# EAGLE board fabduino (EAGLE 6.4)
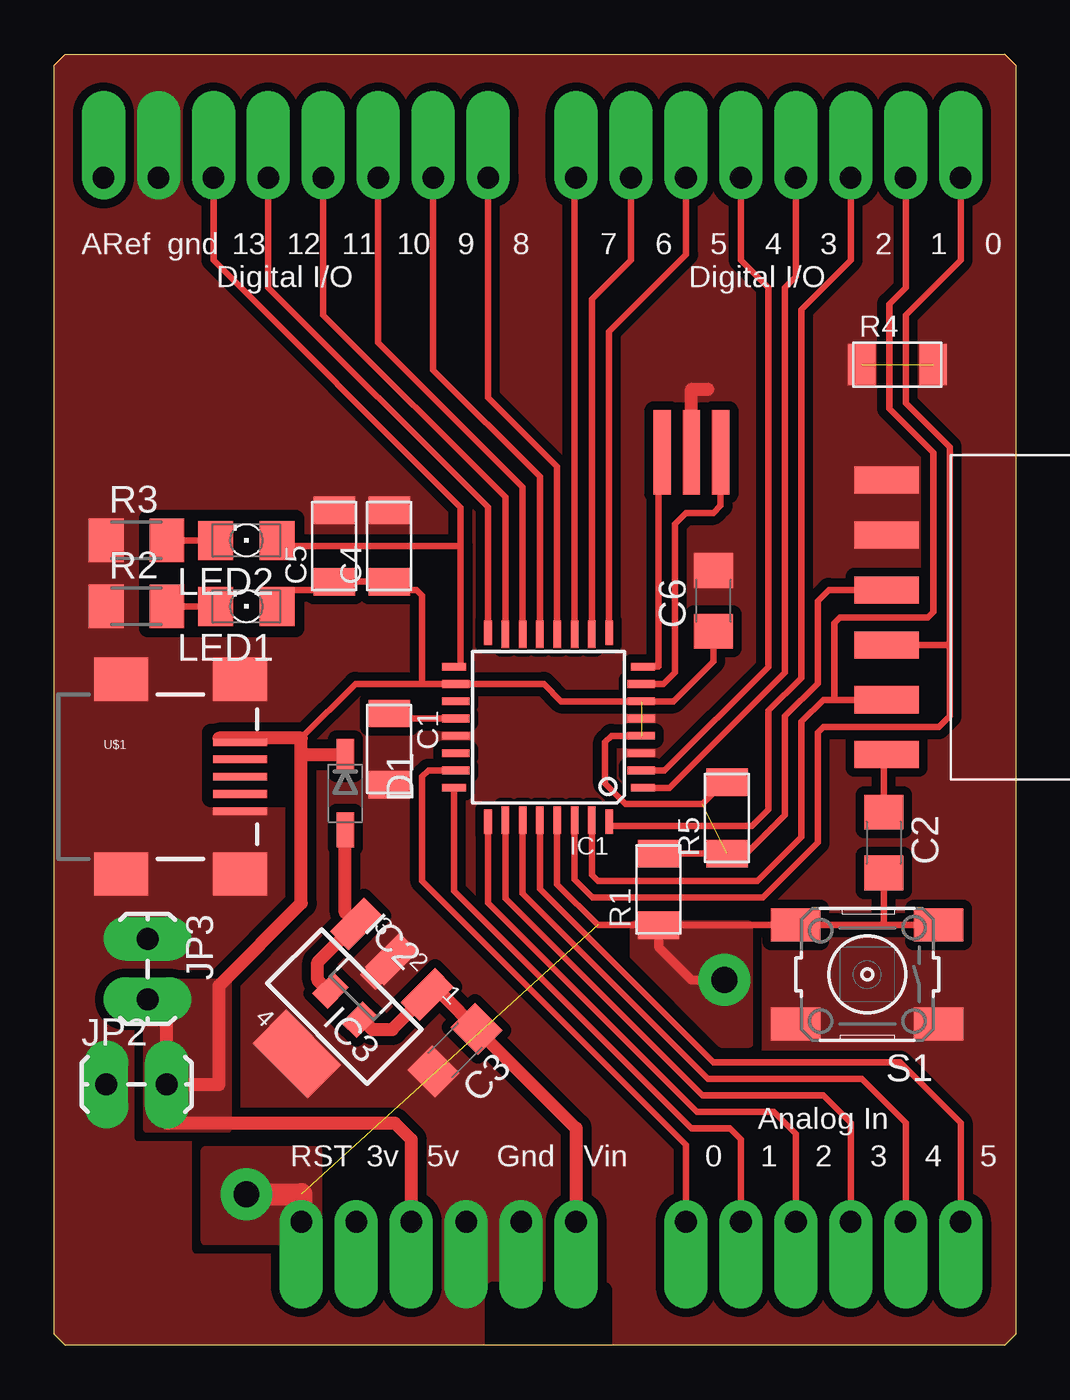
[diagram p0: board, top side]
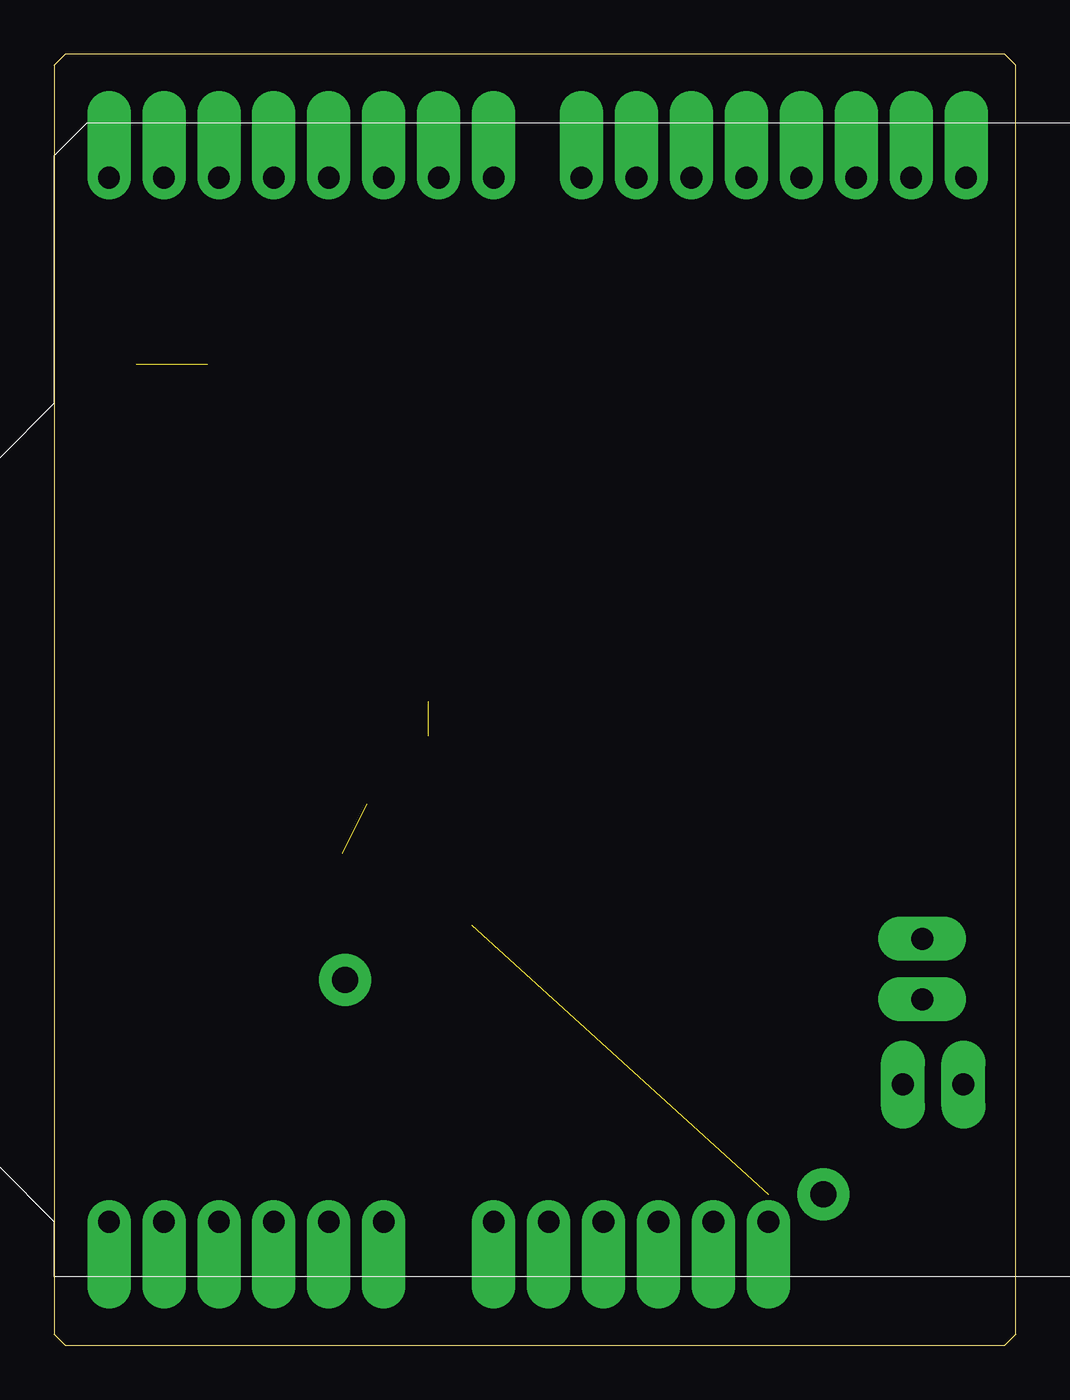
[diagram p1: board, bottom side, seen from below]

Size 44.45 x 59.69 mm. Coordinates in mm from the lower left corner, seen from the top.
Outline: 0,59.18 0.51,59.69 43.94,59.69 44.45,59.18 44.45,0.51 43.94,0 0.51,0 0,0.51 0,59.18
Copper layers (1*16): Top 0.035mm / dielectric 1.5mm / Bottom 0.035mm
Design rules "fab *": minimum track width 12mil, minimum drill 0.8mm, track to track 15.5mil, track to pad 15.5mil, pad to pad 15mil, via to via 15mil, smd to smd 10mil, copper to edge 0mil, drill to drill 1mm, minimum pad ring 0.2mm, minimum via ring 0.2mm, stop-mask expansion 4mil, vias tented up to drill 0mil, thermal gap 1mm
tRestrict: area 20.3,0 to 25.4,2.5; area 4.3,33.1 to 11.2,38.2; area 27.7,39.4 to 31.2,43.2; area 7.2,25.3 to 10.8,28.3; area 12.6,14.9 to 14.3,16.6

## Footprints (pad centres in the part's own frame; a part is rotated, then mirrored left to right if it is on the bottom)
C1206FAB = smd 1.27 x 1.905: 1 -1.651,0; 2 1.651,0
C1206 = smd 1.6 x 1.8: 1 -1.4,0; 2 1.4,0
SOD123 = smd 1.6 x 0.8: ANODE 1.7,0; CATHODE -1.7,0
TQFP32-08THIN = smd 1.118 x 0.356: 1 -4.369,2.8; 8 -4.369,-2.8; 17 4.369,-2.8; 24 4.369,2.8 | smd 1.27 x 0.356: 2 -4.293,2; 3 -4.293,1.2; 4 -4.293,0.4; 5 -4.293,-0.4; 6 -4.293,-1.2; 7 -4.293,-2; 18 4.293,-2; 19 4.293,-1.2; 20 4.293,-0.4; 21 4.293,0.4; 22 4.293,1.2; 23 4.293,2 | smd 0.356 x 1.118: 9 -2.8,-4.369; 16 2.8,-4.369; 25 2.8,4.369; 32 -2.8,4.369 | smd 0.356 x 1.27: 10 -2,-4.293; 14 1.2,-4.293; 15 2,-4.293; 26 2,4.293; 27 1.2,4.293; 31 -2,4.293 | smd 0.35 x 1.27: 11 -1.2,-4.293; 12 -0.4,-4.293; 13 0.4,-4.293; 28 0.4,4.293; 29 -0.4,4.293; 30 -1.2,4.293
SOT23 = smd 1 x 1.4: 1 -0.95,-1.1; 2 0.95,-1.1; 3 0,1.1
SOT223 = smd 1.219 x 2.235: 1 -2.311,-3.099; 2 0,-3.099; 3 2.311,-3.099 | smd 3.6 x 2.2: 4 0,3.099
ARDUINO-NOHOLE-OBLONG = drill 1 pad 1.676 offset: 3V 35.56,2.54; 5V 38.1,2.54; A0 50.8,2.54; A1 53.34,2.54; A2 55.88,2.54; A3 58.42,2.54; A4 60.96,2.54; A5 63.5,2.54; AREF 23.876,50.8; D0 63.5,50.8; D1 60.96,50.8; D2 58.42,50.8; D3 55.88,50.8; D4 53.34,50.8; D5 50.8,50.8; D6 48.26,50.8; D7 45.72,50.8; D8 41.656,50.8; D9 39.116,50.8; D10 36.576,50.8; D11 34.036,50.8; D12 31.496,50.8; D13 28.956,50.8; GND 26.416,50.8; GND1 43.18,2.54; GND2 40.64,2.54; RESET 33.02,2.54; VIN 45.72,2.54
1X06-SMD-FEMALE-V2 = smd 1.25 x 3: 1 6.35,3.425; 2 3.81,3.425; 3 1.27,3.425; 4 -1.27,3.425; 5 -3.81,3.425; 6 -6.35,3.425
1X02_LOCK_LONGPADS = drill 1.016 long: 1 -0.127,0; 2 2.667,0
1206 = smd 1.6 x 1.803: A -1.422,0; C 1.422,0
R1206FAB = smd 1.27 x 1.905: 1 -1.651,0; 2 1.651,0
M1206 = smd 1.6 x 2: 1 -1.4,0; 2 1.4,0
6MM_SWITCH = smd 2.286 x 1.524: 1 -3.302,2.286; 2 3.302,2.286; 3 -3.302,-2.286; 4 3.302,-2.286
USB_MINIB = smd 2.5 x 0.35: D+ 3.77,0; D- 3.77,0.8; GND 3.77,-1.6; ID 3.77,-0.8; VBUS 3.77,1.6 | smd 2.5 x 2: SHIELD@1 -1.73,-4.5; SHIELD@2 -1.73,4.5; SHIELD@3 3.77,4.5; SHIELD@4 3.77,-4.5
EFOBM = smd 0.8 x 3.9: 1 -1.35,0; 2 0,0; 3 1.35,0

## Placement (x,y rotation side)
C1  0.1u  [C1206FAB]  15.49,27.56 270 top
C2  0.1u  [C1206]  38.35,23.24 270 top
C3  10u  [C1206]  18.54,13.65 225 top
C4  0.1u  [C1206FAB]  15.49,36.96 90 top
C5  10u  [C1206FAB]  12.95,36.96 90 top
C6  0.1u  [C1206]  30.48,34.42 90 top
D1  [SOD123]  13.46,25.53 270 top
IC1  ATMEGA168  [TQFP32-08THIN]  22.86,28.57 180 top
IC2  [SOT23]  14.22,16.51 315 top
IC3  LM340S  [SOT223]  13.42,15.66 135 top
J4  ARDUINOOBLONG  [ARDUINO-NOHOLE-OBLONG]  -21.59,3.17 0 top
JP1  [1X06-SMD-FEMALE-V2]  41.91,33.66 90 top
JP2  [1X02_LOCK_LONGPADS]  2.54,12.07 0 top
JP3  [1X02_LOCK_LONGPADS]  4.32,18.67 270 top
LED1  GRN  [1206]  8.89,34.16 180 top
LED2  RED  [1206]  8.89,37.21 180 top
R1  10K  [R1206FAB]  27.94,21.08 90 top
R2  499  [M1206]  3.81,34.16 0 top
R3  499  [M1206]  3.81,37.21 0 top
R4  0  [R1206FAB]  38.99,45.34 0 top
R5  0  [R1206FAB]  31.11,24.38 90 top
S1  [6MM_SWITCH]  37.59,17.14 180 top
U$1  USB_MINIB  [USB_MINIB]  4.83,26.29 0 top
X1  8/16M  [EFOBM]  29.46,41.27 180 top

## Library data of the parts
C1 C4 C5 D1 IC1 IC2 R1 R4 R5 S1 U$1 X1 = fab
C2 C3 C6 R2 R3 = rcl
IC3 = linear
J4 = arduino
JP1-JP3 = SparkFun
LED1 LED2 = led

## Nets
3V: J4.3V
A0: IC1.23 J4.A0
A1: IC1.24 J4.A1
A2: IC1.25 J4.A2
A3: IC1.26 J4.A3
A4: IC1.27 J4.A4
A5: IC1.28 J4.A5
AREF: C1.1 IC1.20
D2: IC1.32 J4.D2
D3: IC1.1 J4.D3
D4: IC1.2 J4.D4
D5: IC1.9 J4.D5
D6: IC1.10 J4.D6
D7: IC1.11 J4.D7
D8: IC1.12 J4.D8
D9: IC1.13 J4.D9
D10: IC1.14 J4.D10
DTR: C2.1 JP1.6
GND: C1.2 C3.2 C4.2 C5.2 C6.2 IC1.3 IC1.5 IC1.21 IC2.3 IC3.2 IC3.4 J4.GND J4.GND1 J4.GND2 JP1.1 JP1.2 JP2.1 JP3.1 R2.1 R3.1 R4.1 R4.2 S1.1 S1.2 U$1.GND U$1.SHIELD@1 U$1.SHIELD@2 U$1.SHIELD@3 U$1.SHIELD@4 X1.2
MISO: IC1.16 J4.D12
MOSI: IC1.15 J4.D11
N$1: IC1.7 X1.1
N$2: D1.ANODE IC2.1 IC3.3
N$3: IC1.8 X1.3
N$6: LED1.C R2.2
N$7: LED2.C R3.2
RST: C2.2 IC1.29 J4.RESET R1.1 S1.3 S1.4
RXI: IC1.30 J4.D0 JP1.4
SCK: IC1.17 J4.D13 LED2.A
TXO: IC1.31 J4.D1 JP1.5
VCC: C4.1 C5.1 C6.1 D1.CATHODE IC1.4 IC1.6 IC1.18 J4.5V JP1.3 JP2.2 JP3.2 LED1.A R1.2 R5.1 R5.2 U$1.VBUS
VIN: C3.1 IC2.2 IC3.1 J4.VIN

## Tracks (layer width: path | path; a pad name or v marks a point on that pad's centre or on a via)
A0
  Top 0.305: 18.54,26.54 IC1.23 17.3,26.57 17.02,26.29 17.02,21.46 29.21,9.27 J4.A0
A1
  Top 0.305: IC1.24 | IC1.24 18.8,25.78 | IC1.24 18.49,21.01 29.46,10.03 31.24,10.03 31.75,9.52 J4.A1
A2
  Top 0.305: IC1.25 20.06,20.45 29.72,10.79 33.27,10.79 34.29,9.78 J4.A2
A3
  Top 0.305: IC1.26 20.86,20.67 29.97,11.56 35.56,11.56 36.83,10.29 J4.A3
A4
  Top 0.305: IC1.27 21.66,20.89 30.23,12.32 37.34,12.32 39.37,10.29 J4.A4
A5
  Top 0.305: IC1.28 22.46,21.1 30.48,13.08 39.12,13.08 41.91,10.29 J4.A5
AREF
  Top 0.305: C1.1 15.51,28.98 IC1.20
D2
  Top 0.305: IC1.32 25.66,24 32.26,24 33.02,24.77 33.02,29.34 34.54,30.86 34.54,47.88 36.83,50.16 J4.D2
D3
  Top 0.305: IC1.1 28.44,25.78 33.78,31.12 33.78,48.89 34.29,49.4 J4.D3
D4
  Top 0.305: IC1.2 28.23,26.57 33.02,31.37 33.02,48.89 31.75,50.16 J4.D4
D5
  Top 0.305: IC1.9 25.66,46.87 29.21,50.42 J4.D5
D6
  Top 0.305: IC1.10 24.86,48.35 26.67,50.16 J4.D6
D7
  Top 0.305: IC1.11 24.06,53.9 J4.D7
D8
  Top 0.305: IC1.12 23.26,40.62 20.07,43.81 J4.D8
D9
  Top 0.305: IC1.13 22.46,40.15 17.53,45.08 J4.D9
D10
  Top 0.305: IC1.14 21.66,39.68 14.99,46.35 J4.D10
DTR
  Top 0.305: JP1.6 38.35,27.17 C2.1
GND  (1 unrouted)
  Top 0.61: X1.2 29.46,44.2 30.23,44.2
  pour Top (isolate 0.406, rank 2, no thermals): 0.51,59.69 43.94,59.69 44.45,59.18 44.45,0.51 43.94,0 0.51,0 0,0.51 0,59.18
  pour Top (no thermals): 26.67,47.88 26.67,44.32 32,44.32 32,47.88
  pour Top (rank 2, no thermals): 0.43,39.7 10.72,39.7 10.72,44.53 8.38,46.86 0.43,46.89
MISO
  Top 0.305: J4.D12 9.91,48.89 20.06,38.74 IC1.16
MOSI
  Top 0.305: J4.D11 12.45,47.62 20.86,39.21 IC1.15
N$1
  Top 0.305: IC1.7 28.16,30.57 28.7,31.12 28.7,37.97 29.21,38.48 30.48,38.48 30.81,38.81 X1.1
N$2
  Top 0.61: IC2.1 12.68,16.4 12.19,16.89 12.19,17.71 IC3.3 13.46,20 D1.ANODE
N$3
  Top 0.305: 27.94,41.1 X1.3 27.94,41.27 27.94,31.38 IC1.8
N$6
  Top 0.305: R2.2 LED1.C
N$7
  Top 0.305: R3.2 LED2.C
RST  (via drill 1.2)  (1 unrouted)
  Top 0.305: IC1.29 23.26,21.32 25.15,19.43 R1.1 S1.4 | 38.35,19.43 S1.3 | S1.4 35.81,19.43 | 38.35,19.43 C2.2 | S1.4 38.35,19.43
  Top 0.406: v30.99,16.89 29.46,16.89 27.94,18.41 R1.1
  Top 1.016: J4.RESET 11.43,6.98 v8.89,6.98
  pour Top (isolate 0.508, no thermals): 26.8,19.43 26.8,18.03 30.86,13.97 32.13,13.97 32.13,19.43
  pour Top (no thermals): 6.99,9.02 12.19,9.02 12.19,4.83 6.99,4.83
RXI
  Top 0.305: IC1.30 24.06,21.53 24.89,20.7 32.77,20.7 35.31,23.24 35.31,28.32 35.56,28.57 40.89,28.57 41.4,29.08 41.4,32.38 | 41.4,32.38 41.4,41.53 39.37,43.56 39.37,47.62 41.91,50.16 J4.D0 | 41.4,32.38 JP1.4
SCK
  Top 0.305: J4.D13 7.37,50.16 18.8,38.73 18.8,36.96 | 18.8,36.96 18.8,31.38 IC1.17 | LED2.A 10.31,36.96 18.8,36.96
TXO
  Top 0.305: IC1.31 24.86,21.75 25.15,21.46 32.51,21.46 34.54,23.5 34.54,28.83 35.56,29.85 36.07,29.85 | J4.D1 39.37,48.89 38.61,48.13 38.61,43.31 40.64,41.27 40.64,33.91 40.39,33.66 36.32,33.66 36.07,33.4 36.07,29.85 | 39.62,29.85 JP1.5 36.07,29.85
VCC  (2 unrouted)
  Top 0.305: R1.2 R5.1 | R5.1 31.88,22.99 | R5.2 30.86,25.78 30.73,25.78 29.97,25.02 26.42,25.02 25.47,25.96 25.47,27.88 25.76,28.18 IC1.4 | C6.1 30.48,31.62 28.63,29.78 IC1.6 23.44,29.78 22.64,30.57 IC1.18 17.02,30.57 | R5.1 32,22.73 33.78,24.51 33.78,29.08 35.31,30.61 35.31,34.42 35.81,34.92 JP1.3 | 7.62,28.07 7.62,27.89 U$1.VBUS | LED1.A 10.31,34.92 12.7,34.92 12.7,35.31 C5.1 C4.1 15.49,35.18 15.24,34.92 16.76,34.92 17.02,34.67 17.02,30.57 | 11.43,28.07 13.94,30.57 17.02,30.57
  Top 0.61: J4.5V 16.51,9.52 15.75,10.29 5.21,10.29 JP2.2 | 7.62,28.07 11.43,28.07 11.43,27.3 | JP2.2 7.62,12.07 7.62,16.64 11.43,20.45 11.43,27.3 | JP3.2 5.21,16 JP2.2 | D1.CATHODE 13.38,27.3 11.43,27.3
  pour Top (isolate 0.508, no thermals): 4.32,16.76 8,16.76 8,10.03 4.32,10.03
VIN
  Top 0.61: IC2.2 14.28,15.06 14.73,14.61 15.63,14.61 IC3.1 17.95,16.22 C3.1 24.13,10.04 J4.VIN

## Text on the board
tRestrict: AB | and | uino